# Altium PCB MDBU017A.PcbDoc (part 1 of 2)
Units mil, origin at the board's own origin, x right, y up, seen from the top; angles counter-clockwise.
Board outline 2200 x 2400 mil, 4 copper layers (Top Layer, Signal Layer 1, Signal Layer 2, Bottom Layer), stack 62.8 mil thick; 116 components, 72 nets, 394 pads, 309 vias.
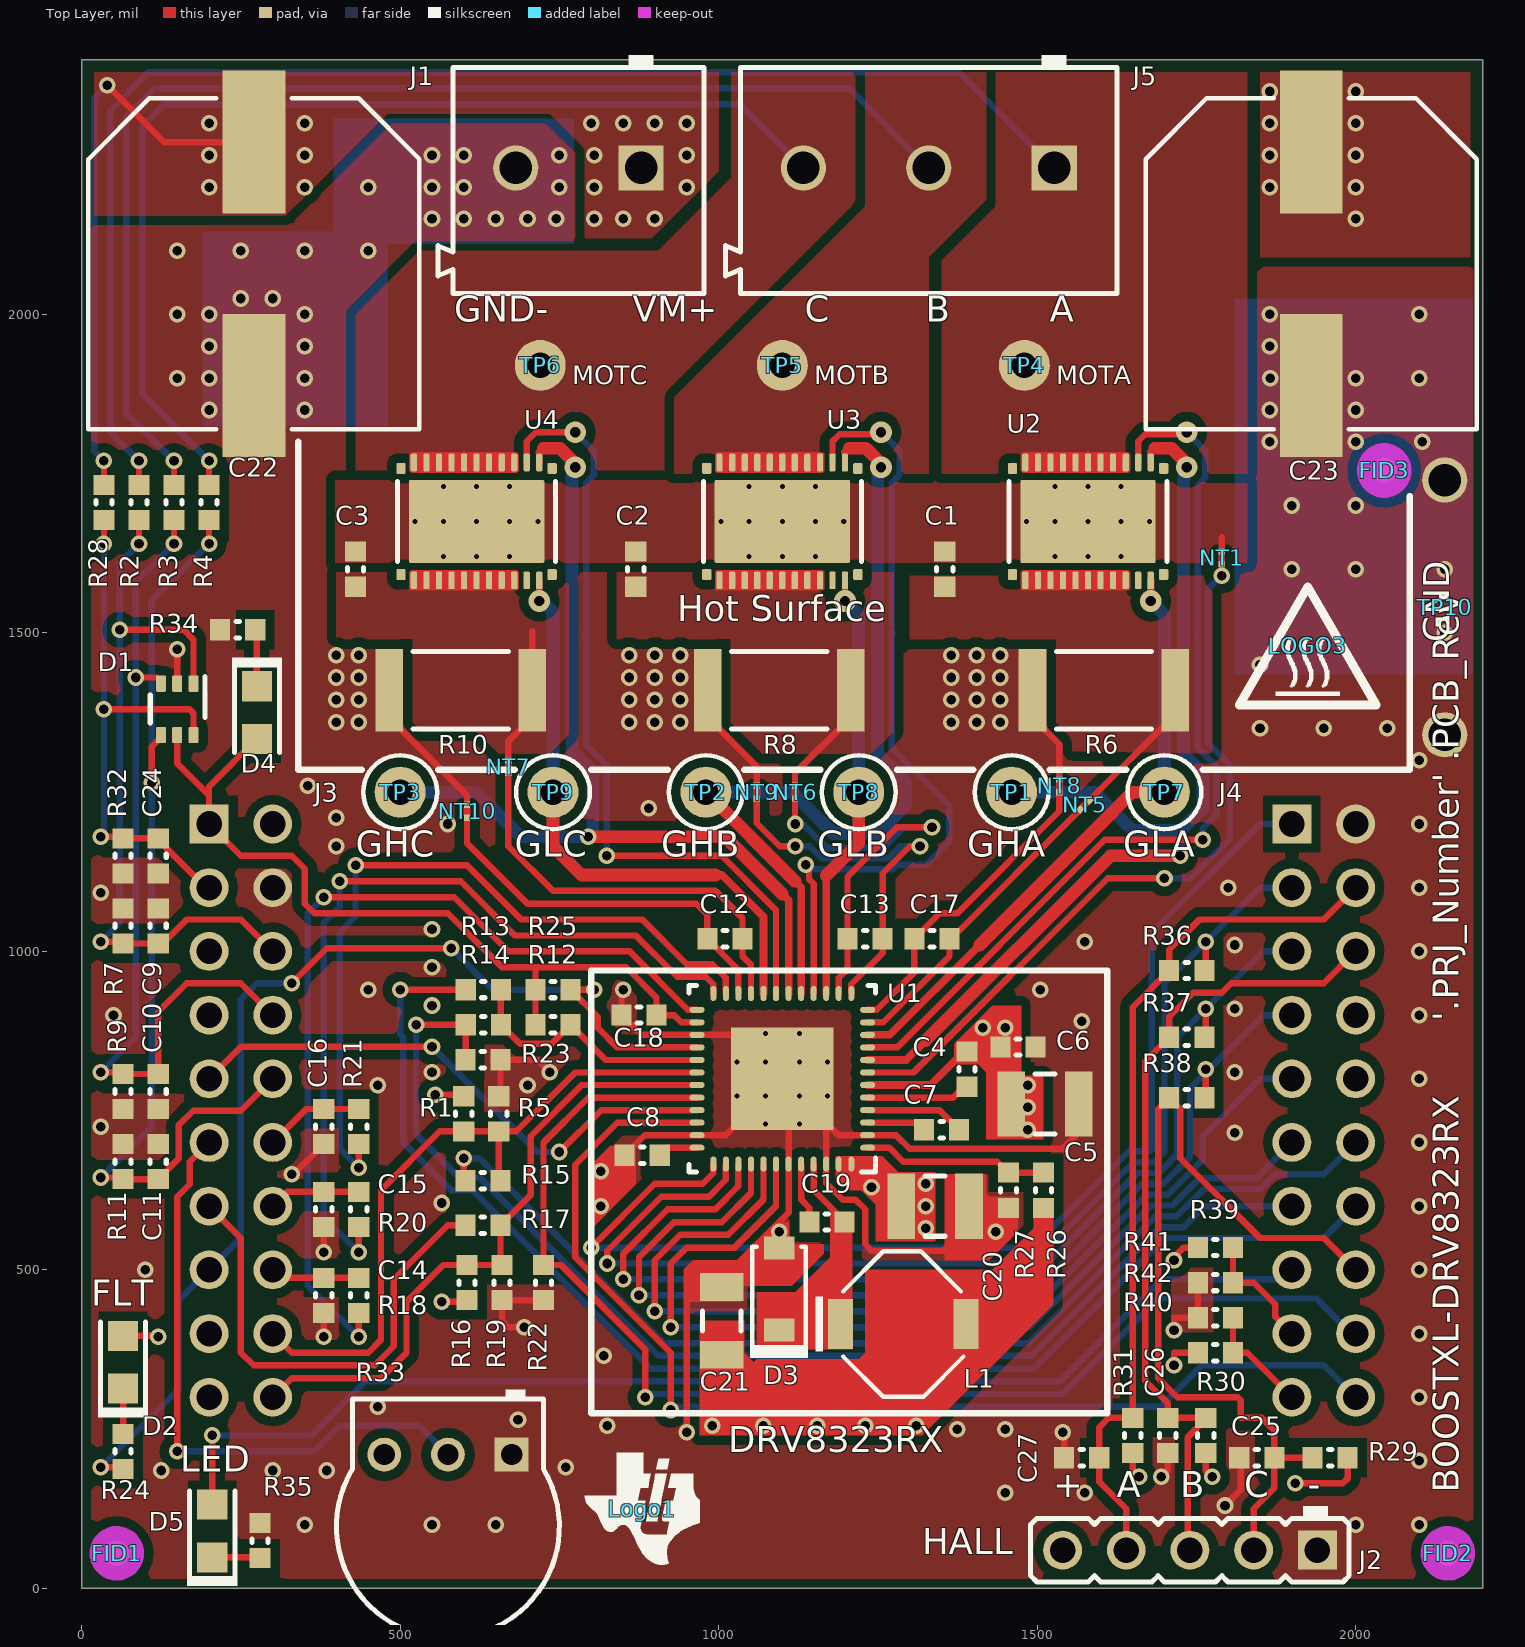
[diagram p0: Top Layer view]
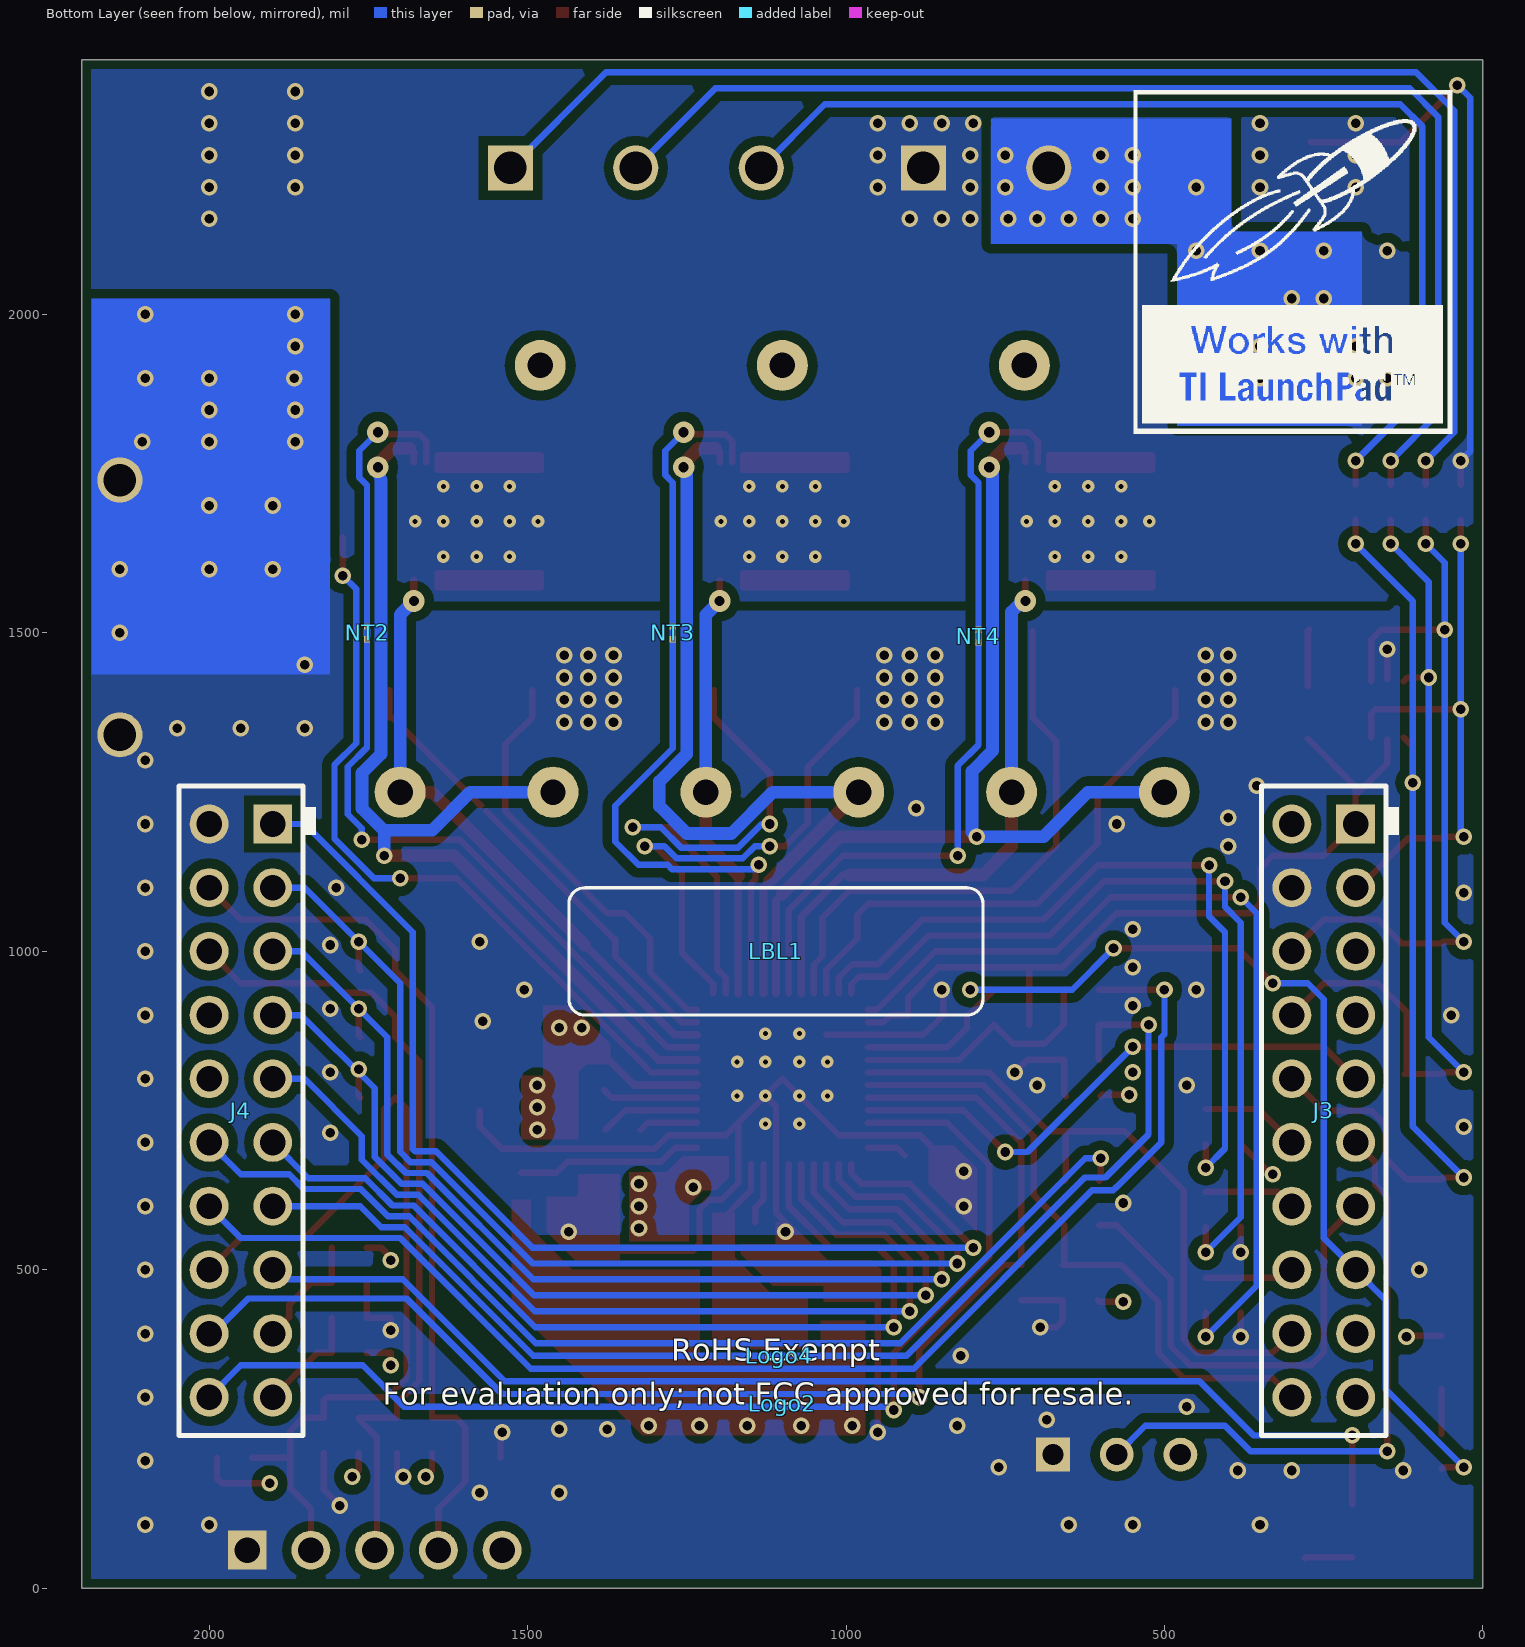
[diagram p1: Bottom Layer view, seen from below]
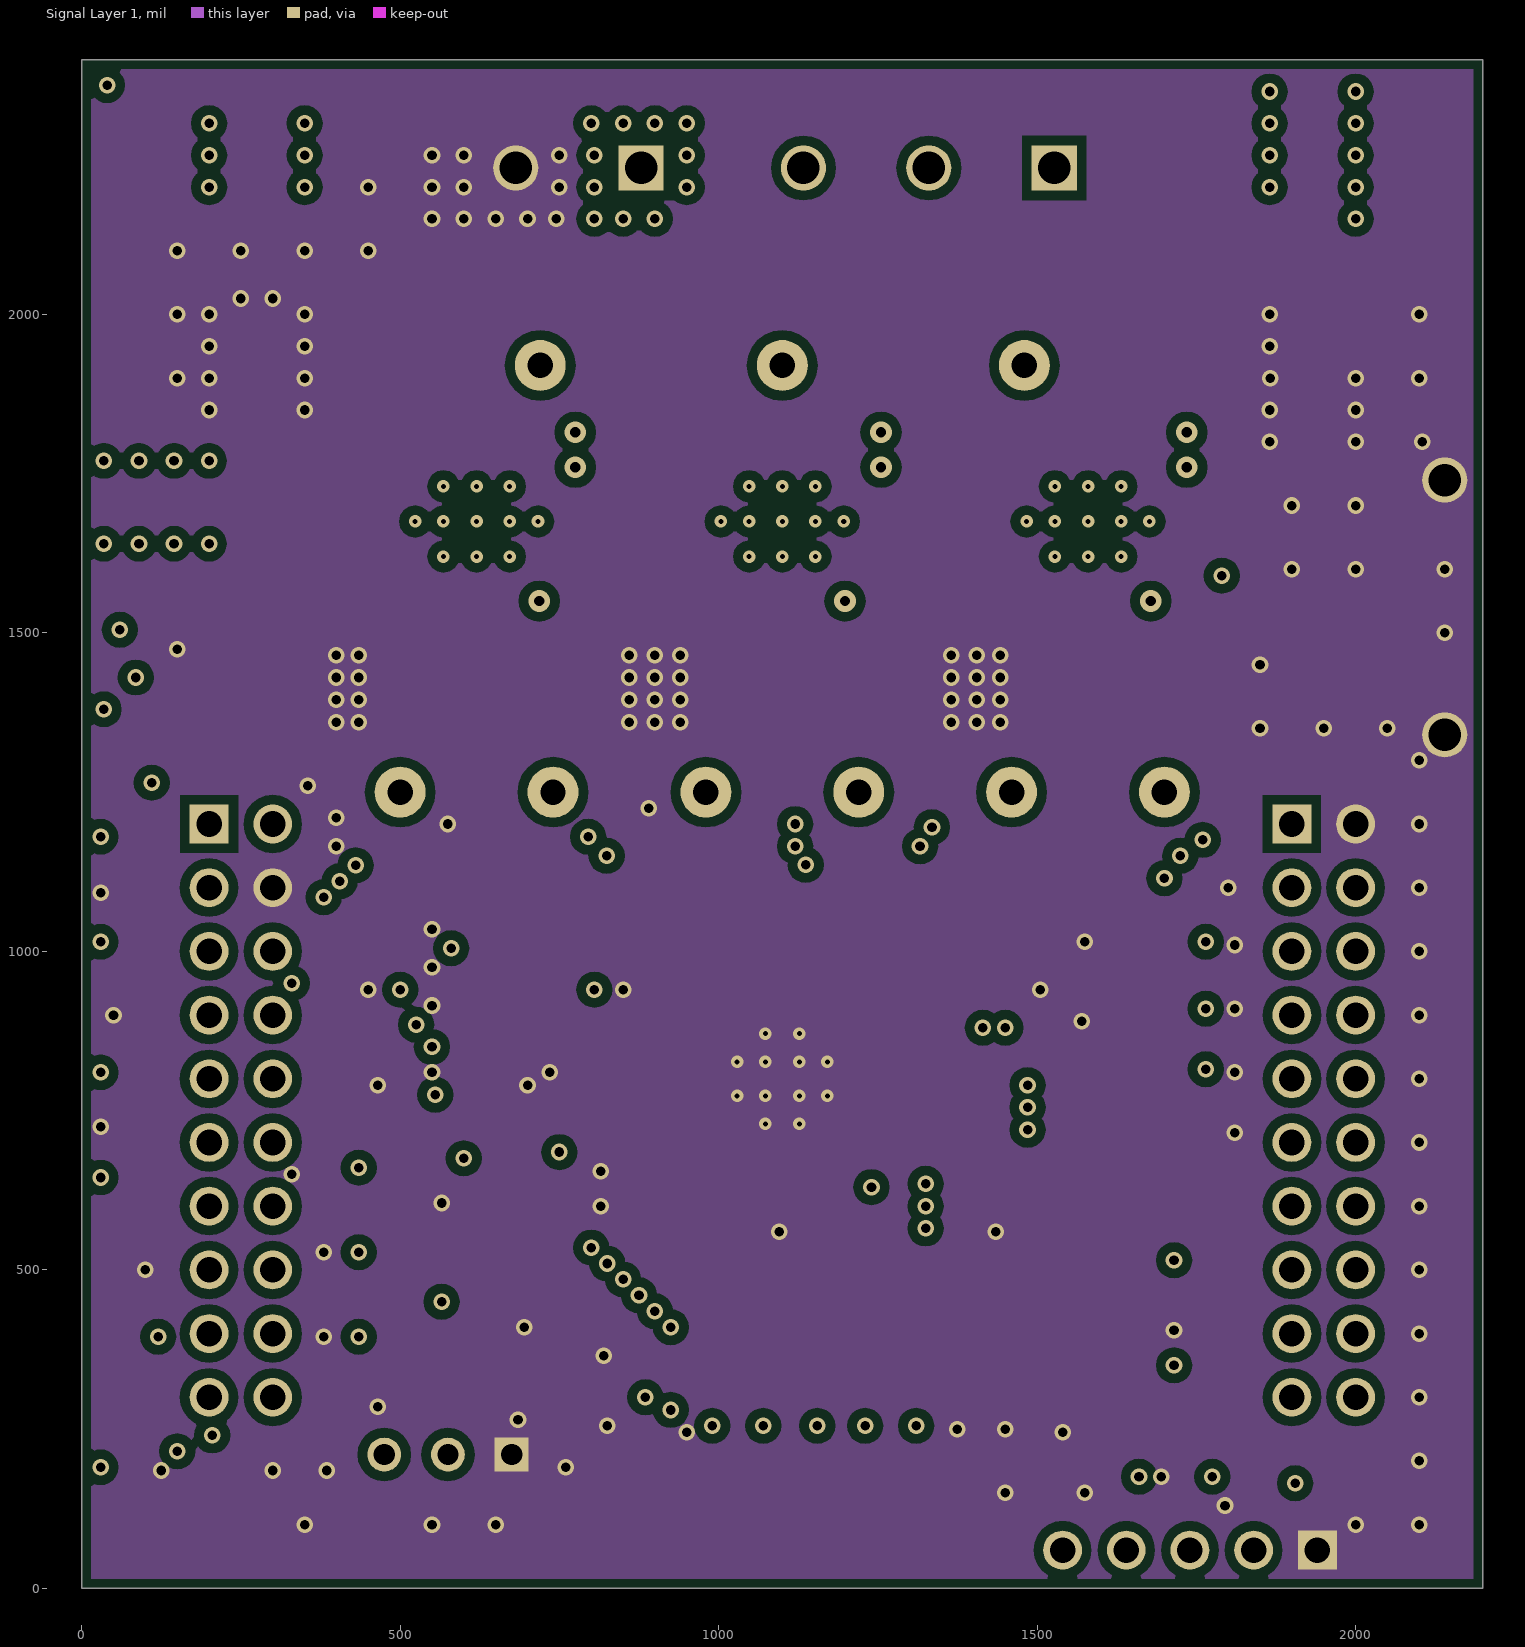
[diagram p2: Signal Layer 1]
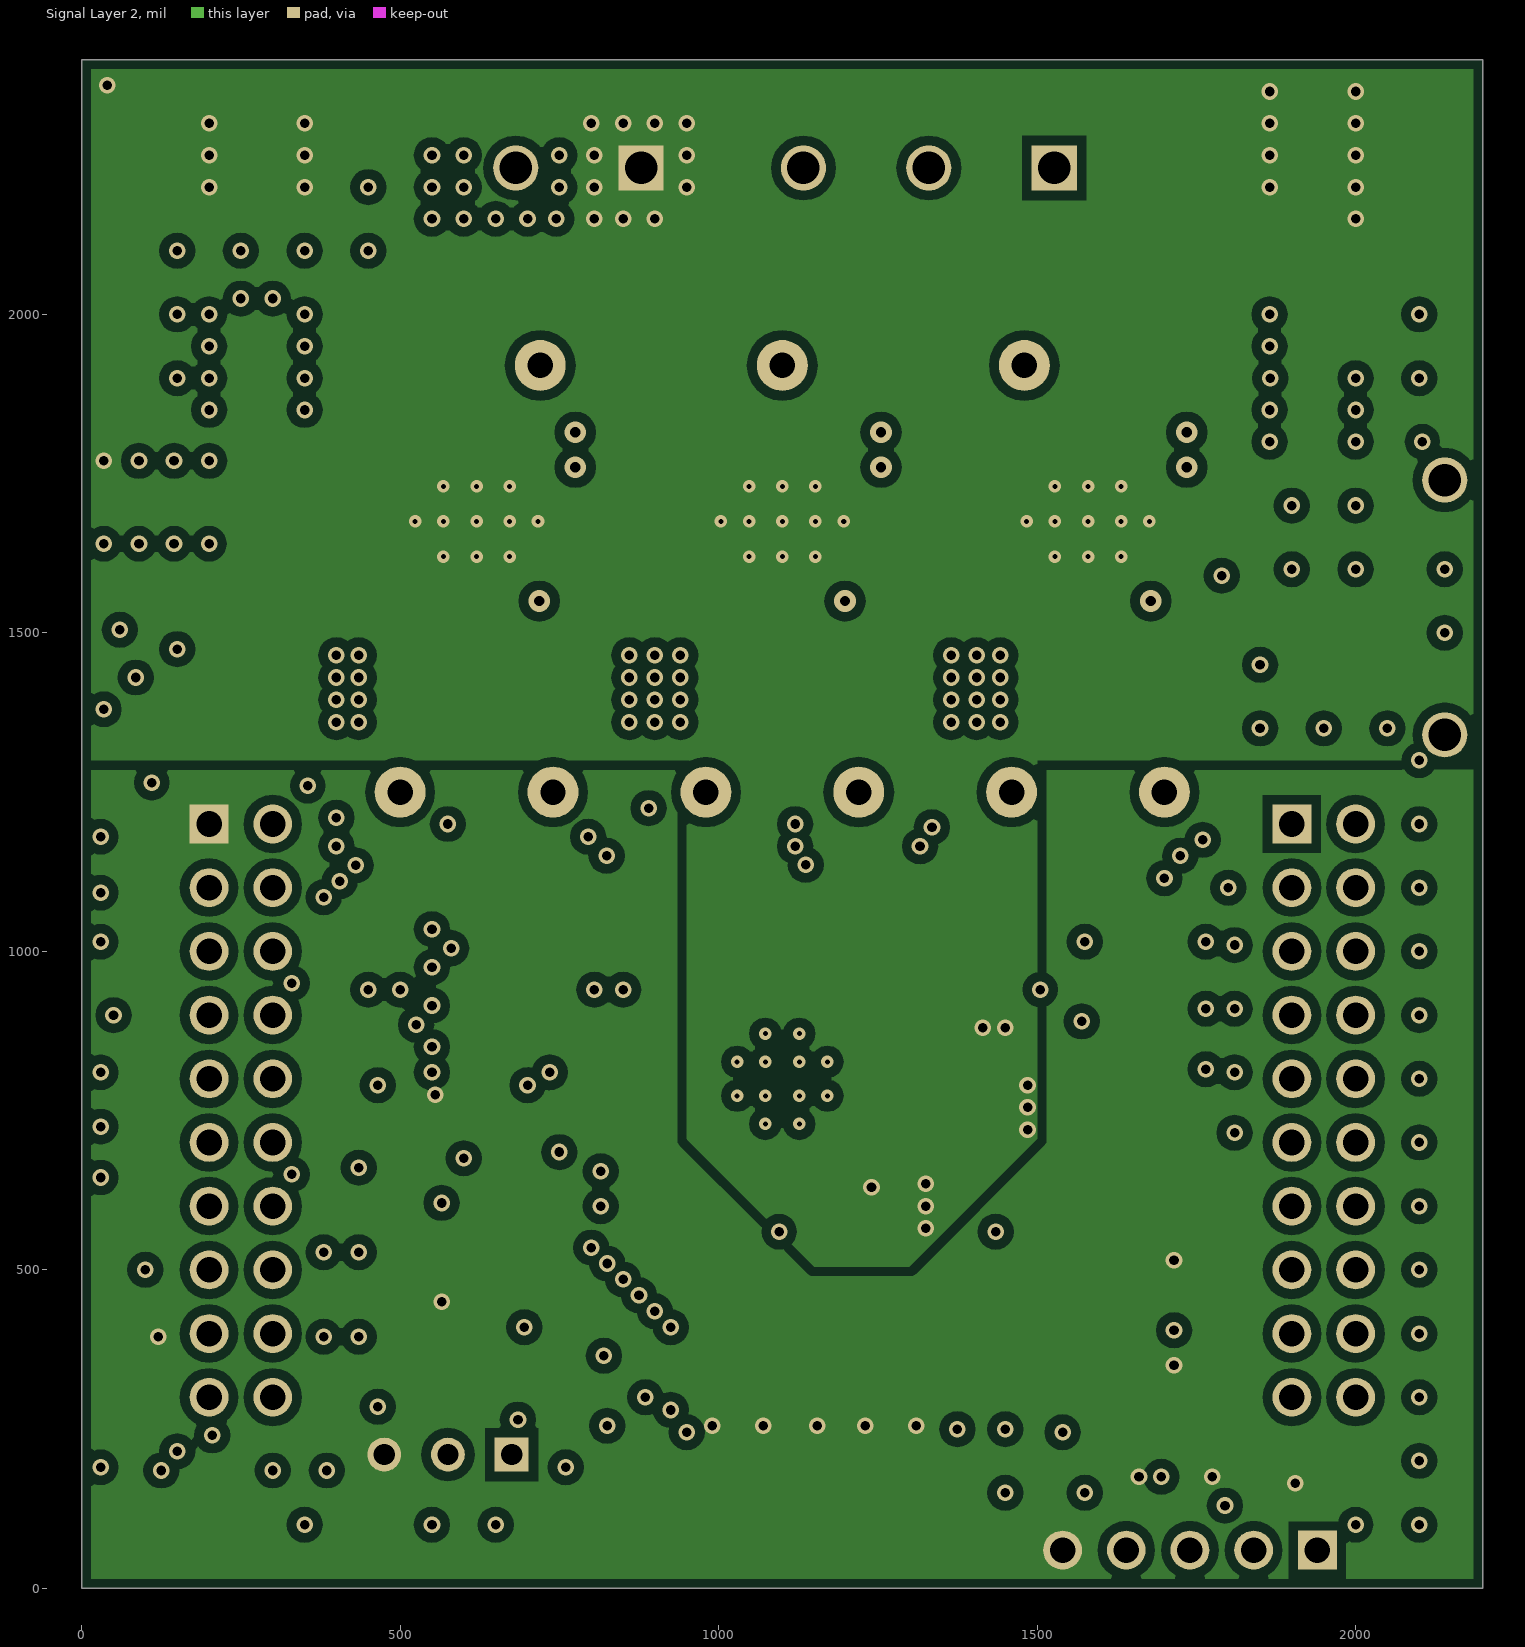
[diagram p3: Signal Layer 2]

## Layer stack, top to bottom
Top Solder: solder mask 0.4, Solder Resist, Dk 3.5
Top Layer: signal copper 2.8
Dielectric 1: prepreg 8, FR-4, Dk 4.2
Signal Layer 1: signal copper 1.4
Dielectric 2: core 38.4, FR-4, Dk 4.2
Signal Layer 2: signal copper 1.4
Dielectric 3: prepreg 8, FR-4, Dk 4.2
Bottom Layer: signal copper 2.8
Bottom Solder: solder mask 0.4, Solder Resist, Dk 3.5

## Board outline
0,0 2200,0 2200,2400 0,2400

## Design rules (kind name [scope] priority, off if disabled: settings)
AcuteAngle [All] p1: minimum=4.50000000000000E+0001 checktracksonly=FALSE
AssemblyTestPointUsage [All] p1: valid=2
BoardOutlineClearance BoardOutlineClearance_MountingHoles [OnCopper and InComponentClass('Mounting Holes')] p1: gap=40
BoardOutlineClearance BoardOutlineClearance_Poly [OnCopper and InPoly] p2: gap=15
BoardOutlineClearance [OnCopper and Not InComponentClass('Logo') and not InComponentClass('FiducialMark') and not InRegion(1000,500,4000,800)] p3: gap=15
Clearance Clearance_Keepouts [((IsTrack Or IsArc) And Not InPoly) And IsFree and IsKeepOut vs ((IsTrack Or IsArc) And Not InPoly) And IsFree and IsKeepOut] p1: gap=0
Clearance Clearance_Poly [InPolygon] p2: gap=15
Clearance [All] p3: gap=7 except(5: SMDPad-Poly SMDPad-Region)
ComponentClearance ComponentClearance_MountingHoles_FiducialMarks [InComponentClass('Mounting Holes') vs InComponentClass('FiducialMark')] p1: gap=50 collisioncheckmode=3 verticalgap=10 showdistances=FALSE
ComponentClearance ComponentClearance_Shunt [InComponentClass('Header') vs InComponentClass('Shunt')] p2: gap=0 collisioncheckmode=3 verticalgap=0 showdistances=FALSE
ComponentClearance ComponentClearance_Logo [InComponentClass('Logo')] p3: gap=20 collisioncheckmode=3 verticalgap=10 showdistances=FALSE
ComponentClearance ComponentClearance_ScrewToNut [(HasFootprint('NY PMS 440 0025 PH')) vs (HasFootprint('Keystone_1902C'))] p4: gap=5 collisioncheckmode=3 verticalgap=10 showdistances=FALSE
ComponentClearance ComponentClearance_MountingHoles [InComponentClass('Mounting Holes')] p5: gap=250 collisioncheckmode=3 verticalgap=100000 showdistances=FALSE
ComponentClearance ComponentClearance_SmallPassives [HasFootprint('0201*') or HasFootprint('0402*') or HasFootprint('0508') or HasFootprint('0603*') or HasFootprint('0612') or HasFootprint('0805*') or HasFootprint('0815*') or HasFootprint('0830*') or HasFootprint('1206*') or HasFootprint('1210*') or HasFootprint('1808*') or HasFootprint('1812*') or HasFootprint('1825*') or HasFootprint('2010*') or HasFootprint('2220*') or HasFootprint('2225*') or HasFootprint('2512*') or HasFootprint('2728*') or HasFootprint('3518*') vs HasFootprint('0201*') or HasFootprint('0402*') or HasFootprint('0508') or HasFootprint('0603*') or HasFootprint('0612') or HasFootprint('0805*') or HasFootprint('0815*') or HasFootprint('0830*') or HasFootprint('1206*') or HasFootprint('1210*') or HasFootprint('1808*') or HasFootprint('1812*') or HasFootprint('1825*') or HasFootprint('2010*') or HasFootprint('2220*') or HasFootprint('2225*') or HasFootprint('2512*') or HasFootprint('2728*') or HasFootprint('3518*')] p6: gap=14.96 collisioncheckmode=3 verticalgap=10 showdistances=FALSE
ComponentClearance ComponentClearance_THtoSMT [IsThruComponent vs IsSMTComponent] p7: gap=20 collisioncheckmode=3 verticalgap=20 showdistances=FALSE
ComponentClearance ComponentClearance_THtoTH [IsThruComponent vs IsThruComponent] p8: gap=20 collisioncheckmode=3 verticalgap=20 showdistances=FALSE
ComponentClearance [All] p9: gap=10 collisioncheckmode=3 verticalgap=10 showdistances=FALSE
DiffPairsRouting [All] p1: maxlimit=100 minlimit=10 mostfreqgap=10 toplayer_minwidth=15 toplayer_maxwidth=15 toplayer_prefwidth=15 midlayer1_minwidth=15 midlayer1_maxwidth=15 midlayer1_prefwidth=15 midlayer2_minwidth=15 midlayer2_maxwidth=15 midlayer2_prefwidth=15 bottomlayer_minwidth=15 bottomlayer_maxwidth=15 bottomlayer_prefwidth=15 maxuncoupledlength=1000
FabricationTestPointUsage TestPointUsage [All] p1: valid=2 allowmultiple=FALSE
FabricationTestpoint Testpoint [All] p1: side=3 testpointundercomponent=TRUE minsize=40 maxsize=100 preferedsize=60 minholesize=0 maxholesize=40 preferedholesize=32 testpointgrid=1 allowsidetop=TRUE allowsidebottom=TRUE usegrid=TRUE gridtolerance=0.01
FanoutControl Fanout_LCC [IsLCC] p1: bgadir=Out bgaviamode=Centered fanoutstyle=Auto fanoutdirection=Alternating viagrid=1 // Fanout_LCC (Default Rule)
FanoutControl Fanout_BGA [IsBGA] p2: bgadir=Out bgaviamode=Centered fanoutstyle=Auto fanoutdirection=Alternating viagrid=1 // Fanout_BGA (Default Rule)
FanoutControl Fanout_Default [All] p4: bgadir=Out bgaviamode=Centered fanoutstyle=Auto fanoutdirection=Alternating viagrid=1 // Fanout_Default (Default Rule)
FanoutControl Fanout_Small [(CompPinCount < 5)] p5: bgadir=Out bgaviamode=Centered fanoutstyle=Auto fanoutdirection=OutThenIn viagrid=1 // Fanout_Small (Default Rule)
HoleSize [All] p1: absolutevalues=TRUE maxlimit=251 minlimit=7.87 maxpercent=80.000 minpercent=20.000
MinimumAnnularRing MinimumAnnularRing_ThermalPadVias [IsVia and InAnyComponent] p1: minimumring=5.91
MinimumAnnularRing [All] p2: minimumring=5.5
MinimumSolderMaskSliver MinimumSolderMaskSliver_Logo [InComponentClass('Logo') vs InComponentClass('Logo')] p1: minsoldermaskwidth=0.7
MinimumSolderMaskSliver [All] p2: minsoldermaskwidth=3.94
PlaneClearance [All] p1: clearance=15
PlaneConnect [All] p1: planeconnectstyle=Relief reliefexpansion=10 reliefentries=4 reliefconductorwidth=10 reliefairgap=10
PolygonConnect [All] p1: connectstyle=Direct reliefconductorwidth=10 reliefentries=4 polygonreliefangle="90 Angle" airgapwidth=10
RoutingVias ThermalPadVias [IsVia and InAnyComponent] p1: holewidth=7.87 width=19.68 viastyle="Through Hole" minholewidth=7.87 minwidth=19.68 maxholewidth=12.99 maxwidth=23.62
RoutingVias [All] p2: holewidth=16 width=34 viastyle="Through Hole" minholewidth=7.87 minwidth=26 maxholewidth=40 maxwidth=65
SilkToBoardRegionClearance [Not ((IsComment or IsDesignator) And (Hide <> 'False')) and not InRegion(1000,500,4000,800)] p1:
SilkToSilkClearance SilkToSilkClearance_Pb-FreeLogo [(HasFootprint('Pb-Free_Overlay_Medium') OR HasFootprint('Pb-Free_Overlay_Small')) vs (HasFootprint('Pb-Free_Overlay_Medium') OR HasFootprint('Pb-Free_Overlay_Small'))] p1: silktosilkclearance=0
SilkToSilkClearance [All] p2: silktosilkclearance=4
SilkToSolderMaskClearance SilkToComponentPadClearance [IsPad and InAnycomponent] p1: minsilkscreentomaskgap=5 clearancetoexposedcopper=TRUE
SilkToSolderMaskClearance "Silk to Solder Mask Opening" [All] p2: minsilkscreentomaskgap=4 clearancetoexposedcopper=FALSE
SolderMaskExpansion [All] p1: expansion=1.97
Width [All] p1: maxlimit=100 minlimit=6 preferedwidth=10 checkconnectedcopper=TRUE
14 further rules are at their usual default settings.

## Classes and differential pairs
component class Header: J2
component class MDBU017A: C1 C2 C3 C4 C5 C6 C7 C8 C9 C10 C11 C12 C13 C14 C15 C16 C17 C18 C19 C20 C21 C22 C23 C24 C25 C26 C27 D1 D2 D3 D4 D5 J1 J2 J3 J4 J5 L1 NT1 NT2 NT3 NT4 NT5 NT6 NT7 NT8 NT9 NT10 R1 R2 R3 R4 R5 R6 R7 R8 R9 R10 R11 R12 R13 R14 R15 R16 R17 R18 R19 R20 R21 R22 R23 R24 R25 R26 R27 R28 R29 R30 R31 R32 R33 R34 R35 R36 R37 R38 R39 R40 R41 R42 Text TP1 TP2 TP3 TP4 TP5 TP6 TP7 TP8 TP9 TP10 U1 U2 U3 U4
component class Label: LBL1
component class AssemblyNote: ZZ1 ZZ2 ZZ3 ZZ4
component class FiducialMark: FID1 FID2 FID3
component class MDBU017A_Hardware: FID1 FID2 FID3 LBL1 Logo1 Logo2 LOGO3 Logo4 ZZ1 ZZ2 ZZ3 ZZ4
component class Logo: Logo1

## Components (designator, comment, footprint, x,y, rotation, side; value= is the part's Value field where it differs from the comment)
C1 "C0603C103K1RACTU" 0603L 1355,1600 r270 top
C2 "C0603C103K1RACTU" 0603L 870,1600 r270 top
C3 "C0603C103K1RACTU" 0603L 430,1600 r270 top
C4 "885012206052" 0603L 1390,815 r270 top
C5 "GRM32ER71K475KE14L" 1210_270L 1512.55,760.25 r0 top
C6 "GRM188R72A104KA35D" 0603L 1470,850 r0 top
C7 "C1608X7S2A473K080AB" 0603L 1350,720 r180 top
C8 "GRM188R70J105KA01D" 0603L 880,680 r180 top
C9 "C0603C104J4RACTU" 0603L 120,1040 r90 top
C10 "C0603C104J4RACTU" 0603L 120,780 r270 top
C11 "C0603C104J4RACTU" 0603L 120,670 r90 top
C12 "GRM188R71C102KA01D" 0603L 1010,1020 r180 top
C13 "GRM188R71C102KA01D" 0603L 1230,1020 r0 top
C14 "GRM188R71C222KA01D" 0603L 380,460 r270 top
C15 "GRM188R71C222KA01D" 0603L 380,595 r270 top
C16 "GRM188R71C222KA01D" 0603L 380,725 r270 top
C17 "GRM188R71C102KA01D" 0603L 1335,1020 r180 top
C18 "GRM188R70J104KA01D" 0603L 875,900 r180 top
C19 "0603YC104JAT2A" 0603L 1170,575 r0 top
C20 "HMK325B7225KN-T" 1210L 1340,600 r0 top
C21 "C3216X7S1A226M160AC" 1206_180L 1005,420 r90 top
C22 "EMVA630ADA331MKG5S" CAPSMT_62_KG5 270,2080 r270 top
C23 "EMVA630ADA331MKG5S" CAPSMT_62_KG5 1930,2080 r270 top
C24 "C0603C104J4RACTU" 0603L 120,1150 r270 top
C25 "885012206034" 0603L 1845,205 r180 top
C26 "885012206034" 0603L 1705,240 r270 top
C27 "885012206034" 0603L 1570,205 r180 top
D1 "TPD4S009DCKR" DCK0006A_L 150,1380 r270 top
D2 "LTST-C170KRKT" LED_LTST-C170 65,355 r270 top
D3 "MBR1H100SFT3G" SOD-123FL 1095,470 r90 top
D4 "LTST-C171GKT" LED_LTST-C171 275,1375 r90 top
D5 "LTST-C171GKT" LED_LTST-C171 205,90 r270 top
FID1 "Fiducial" Fiducial10-20 55,55 r0 top
FID2 "Fiducial" Fiducial10-20 2145,55 r0 top
FID3 "Fiducial" Fiducial10-20 2045,1755 r0 top
J1 "691 101 710 002" Wurth_691101710002 780,2230 r180 top
J2 "PEC05SAAN" Sullins_PxC05SAAN 1740,60 r180 top
J3 "SSQ-110-03-G-D" Samtec_SSQ-110-03-x-D 250,750 r270 bottom
J4 "SSQ-110-03-G-D" Samtec_SSQ-110-03-x-D 1950,750 r270 bottom
J5 "691 101 710 003" Wurth_691101710003 1330,2230 r180 top
L1 "SD53-150-R" SD53 1290,415 r0 top
LBL1 "Size: 0.65\" x 0.20 \"" Label_650x200 1110,1000 r180 bottom
Logo1 "Texas Instruments" TI_Symbol_Overlay_Small 880,125 r0 top
Logo2 "FCC disclaimer" FCC_disclaimer 1100,290 r180 bottom
LOGO3 "CAUTION HOT SURFACE" IEC_HotSurface_Small 1925,1480 r0 top
Logo4 "EU RoHS Exempt Logo" EURoHS_Exempt_60mil 1105,365 r180 bottom
NT1 "Net-Tie" Net-Tie_10mil 1790,1618.24 r90 top net-tie
NT2 "Net-Tie" Net-Tie_10mil 1752,1500 r270 bottom net-tie
NT3 "Net-Tie" Net-Tie_10mil 1272,1500 r270 bottom net-tie
NT4 "Net-Tie" Net-Tie_10mil 792,1495 r270 bottom net-tie
NT5 "Net-Tie" Net-Tie_10mil 1575,1230 r45 top net-tie
NT6 "Net-Tie" Net-Tie_10mil 1120,1250 r90 top net-tie
NT7 "Net-Tie" Net-Tie_10mil 670,1290 r90 top net-tie
NT8 "Net-Tie" Net-Tie_10mil 1535,1260 r90 top net-tie
NT9 "Net-Tie" Net-Tie_10mil 1060,1250 r90 top net-tie
NT10 "Net-Tie" Net-Tie_10mil 605,1220 r90 top net-tie
R1 "CRCW060375K0JNEA" 0603L 600,745 r90 top
R2 "RC0603FR-0782KL" 0603L 90,1705 r90 top
R3 "RC0603FR-0782KL" 0603L 145,1705 r90 top
R4 "RC0603FR-0782KL" 0603L 200,1705 r90 top
R5 "CRCW060375K0JNEA" 0603L 655,745 r270 top
R6 "CRE2512-FZ-R007E-3" 2512L 1605,1410 r0 top
R7 "RC0603FR-074K99L" 0603L 65,1040 r270 top
R8 "CRE2512-FZ-R007E-3" 2512L 1095,1410 r0 top
R9 "RC0603FR-074K99L" 0603L 65,780 r90 top
R10 "CRE2512-FZ-R007E-3" 2512L 595,1410 r0 top
R11 "RC0603FR-074K99L" 0603L 65,670 r270 top
R12 "CRCW06031K50JNEA" 0603L 740,885 r180 top
R13 "CRCW06030000Z0EA" 0603L 630.55,940 r180 top
R14 "CRCW06030000Z0EA" 0603L 630.55,885 r180 top
R15 "CRCW06030000Z0EA" 0603L 630,640 r180 top
R16 "CRCW060375K0JNEA" 0603L 605,480 r270 top
R17 "CRCW06030000Z0EA" 0603L 630,570 r180 top
R18 "CRCW060356R0JNEA" 0603L 435,460 r270 top
R19 "CRCW060375K0JNEA" 0603L 660,480 r90 top
R20 "CRCW060356R0JNEA" 0603L 435,595 r270 top
R21 "CRCW060356R0JNEA" 0603L 435,725 r270 top
R22 "CRCW060347K0JNEA" 0603L 725,480 r90 top
R23 "CRCW060347K0JNEA" 0603L 630,830 r180 top
R24 "CRCW0603330RJNEA" 0603L 65,215 r90 top
R25 "CRCW060310K0JNEA" 0603L 740,940 r180 top
R26 "CRCW060328K0FKEA" 0603L 1510,625 r270 top
R27 "CRCW06038K45FKEA" 0603L 1455,625 r90 top
R28 "RC0603FR-0782KL" 0603L 35,1705 r90 top
R29 "CRCW06031K00JNEA" 0603L 1960,205 r0 top
R30 "CRCW06031K00JNEA" 0603L 1765,240 r270 top
R31 "CRCW06031K00JNEA" 0603L 1650,240 r270 top
R32 "RC0603FR-074K99L" 0603L 65,1150 r90 top
R33 "3352T-1-503LF" Bourns_3352T 575,210 r180 top
R34 "CRCW0603330RJNEA" 0603L 245,1505 r0 top
R35 "CRCW0603330RJNEA" 0603L 280,75 r270 top
R36 "CRCW06030000Z0EA" 0603L 1735,970 r0 top
R37 "CRCW06030000Z0EA" 0603L 1735,865 r0 top
R38 "CRCW06030000Z0EA" 0603L 1735,770 r0 top
R39 "RC0603FR-0735K7L" 0603L 1780,535 r180 top
R40 "RC0603FR-0735K7L" 0603L 1780,370 r180 top
R41 "RC0603FR-0735K7L" 0603L 1780,480 r0 top
R42 "RC0603FR-0735K7L" 0603L 1780,425 r0 top
TP1 "5002" Keystone5002 1460,1250 r0 top
TP2 "5002" Keystone5002 980,1250 r0 top
TP3 "5002" Keystone5002 500,1250 r0 top
TP4 "5002" Keystone5002 1480,1920 r0 top
TP5 "5002" Keystone5002 1100,1920 r0 top
TP6 "5002" Keystone5002 720,1920 r0 top
TP7 "5002" Keystone5002 1700,1250 r0 top
TP8 "5002" Keystone5002 1220,1250 r0 top
TP9 "5002" Keystone5002 740,1250 r0 top
TP10 "D3082-05" Harwin_D3082-05 2140,1540 r90 top
U1 "DRV8323RSRGZR" RGZ0048B 1100,800 r180 top
U2 "CSD88599Q5DC" DMM0022A 1580,1675 r270 top
U3 "CSD88599Q5DC" DMM0022A 1100,1675 r270 top
U4 "CSD88599Q5DC" DMM0022A 620,1675 r270 top
ZZ1 "This Assembly Note is for PCB labels only" AssemblyNoteLabel 55,2740 r0 top
ZZ2 "These assemblies are ESD sensitive, ESD precautions shall be observed." AssemblyNote 55,2649.11 r0 top
ZZ3 "These assemblies must be clean and free from flux and all contaminants. Use of no clean flux is not acceptable." AssemblyNote 55,2560.56 r0 top
ZZ4 "These assemblies must comply with workmanship standards IPC-A-610 Class 2, unless otherwise specified." AssemblyNote 55,2472 r0 top

## Footprints (in the part's own frame and the unit in brackets; to place one, negate y for a bottom-side part, rotate by r counter-clockwise, add the part's x,y. Pads: shape width x height; smd on the part's side, far side on the other; paste and mask are expansions set on the pad)
0603L [mm] "0603 from SM-752 data"
  rect 0.8x0.85 smd: 1(-0.7,0) 2(0.7,0)
  silkscreen extent -0.07,-0.33 0.07,0.33, body extent -0.87,-0.47 0.87,0.47, height 1
1206_180L [mm] "1206_180"
  rect 1.1x1.75 smd: 1(-1.35,0) 2(1.35,0)
  silkscreen extent -0.4,-0.77 0.4,0.77, body extent -1.75,-0.95 1.75,0.95, height 1.8
1210_270L [mm] "1210"
  rect 1.1x2.6 smd: 1(-1.35,0) 2(1.35,0)
  silkscreen extent -0.4,-1.2 0.4,1.2, body extent -1.7,-1.35 1.7,1.35, height 2.7
1210L [mm] "1210 from SM-752 data"
  rect 1.1x2.6 smd: 1(-1.35,0) 2(1.35,0)
  silkscreen extent -0.4,-1.2 0.4,1.2, body extent -1.7,-1.35 1.7,1.35, height 1.35
2512L [mm] "Chip Resistor, Body 6.3x3.2mm, IPC High Density"
  rect 1.1x3.3 smd: 1(-2.85,0) 2(2.85,0)
  silkscreen extent -1.9,-1.55 1.9,1.55, body extent -3.22,-1.67 3.22,1.67, height 0.71
AssemblyNote [mil] "Assembly Note"
AssemblyNoteLabel [mil] "Assembly Note for PCB Labels"
Bourns_3352T [mm] "TH, 3-Leads, Body 9.53x8.89mm, Pitch 2.54mm"
  rect 1.35x1.35 hole 0.85: 1(-2.54,0)
  round 1.35 hole 0.85: 2(0,0) 3(2.54,0)
  silkscreen extent -4.44,-2.6 4.44,7.31, body extent -4.44,-2.21 4.45,7.32, height 3.81
CAPSMT_62_KG5 [mm] "12.5 x 16mm:  Chemi-Con KG5"
  rect 5.7x2.5 smd: 1(-4.838,0.012) 2(4.862,0.012)
  silkscreen extent -6.59,-6.59 6.61,6.61, body extent -6.59,-6.59 6.61,6.61, height 16.5
DCK0006A_L [mm] "SOT23, 6-Leads, Body 2x1.3mm, Pitch 0.65mm, Lead Span 2.1mm, IPC High Density"
  rrect25% 0.65x0.4 smd: 1(-1.025,0.65) 2(-1.025,0) 3(-1.025,-0.65) 4(1.025,-0.65) 5(1.025,0) 6(1.025,0.65)
  silkscreen extent -1.3,-1.07 0.55,1.1, body extent -1.14,-1 1.14,1, height 0.95
DMM0022A [mm] "SON, 27-Leads, Body 5x6mm, Pitch 0.5mm"
  rrect40% 0.7x0.25 smd: 1(-2.35,2.5) 2(-2.35,2) 21(2.35,2) 22(2.35,2.5)
  rrect40% 0.7x0.25 smd mask+0: 3(-2.35,1.5) 4(-2.35,1) 5(-2.35,0.5) 6(-2.35,0) 7(-2.35,-0.5) 8(-2.35,-1) 9(-2.35,-1.5) 10(-2.35,-2) 11(-2.35,-2.5) 12(2.35,-2.5) 13(2.35,-2) 14(2.35,-1.5) 15(2.35,-1) 16(2.35,-0.5) 17(2.35,0) 18(2.35,0.5) 19(2.35,1) 20(2.35,1.5)
  rrect27% 0.43x0.375 smd: 23(-2.115,3.013) 24(-2.115,-3.013) 25(2.115,-3.013) 26(2.115,3.013)
  rrect3% 3.3x5.4 smd paste-1.65: 27(0,0)
  rrect9% 1.41x1.12 on Top Paste: ""(-0.805,1.98) ""(-0.805,0.66) ""(-0.805,-0.66) ""(-0.805,-1.98) ""(0.805,1.98) ""(0.805,0.66) ""(0.805,-0.66) ""(0.805,-1.98)
  Top Layer region: -2.3,-2.5 -2,-2.5 -2,1.5 -2.3,1.5
  Top Layer region: 2.3,1.5 2,1.5 2,-2.5 2.3,-2.5
  Top Layer region: -2.75,-2.575 -2.75,1.575 -2.742,1.613 -2.721,1.646 -2.688,1.667 -2.65,1.675 -2.65,1.675 -2.05,1.675 -2.012,1.667 -1.979,1.646 -1.958,1.613 -1.95,1.575 -1.95,1.575 -1.95,-2.575 -1.958,-2.613 -1.979,-2.646 -2.012,-2.667 -2.05,-2.675 -2.05,-2.675 -2.65,-2.675 -2.688,-2.667 -2.721,-2.646 -2.742,-2.613 -2.75,-2.575
  Top Layer region: 2.75,-2.575 2.75,1.575 2.742,1.613 2.721,1.646 2.688,1.667 2.65,1.675 2.65,1.675 2.05,1.675 2.012,1.667 1.979,1.646 1.958,1.613 1.95,1.575 1.95,1.575 1.95,-2.575 1.958,-2.613 1.979,-2.646 2.012,-2.667 2.05,-2.675 2.05,-2.675 2.65,-2.675 2.688,-2.667 2.721,-2.646 2.742,-2.613 2.75,-2.575
  silkscreen extent -1.6,-3.15 1.6,3.15, body extent -2.5,-3 2.5,3, height 1.05
EURoHS_Exempt_60mil [mil] "EU RoHS Exempt symbol"
FCC_disclaimer [mil]
Fiducial10-20 [mm]
  round 1 smd mask+0.5: 1(0,0)
  Top Layer keep-out circle w1.178: c0,0 r0.5
Harwin_D3082-05 [mm] "Shorting Plug, 10.16mm spacing, TH"
  round 1.8 hole 1.3: 1(-5.08,0) 2(5.08,0)
  body extent -5.6,-0.52 5.61,0.52, height 6.63
IEC_HotSurface_Small [mil]
  silkscreen extent -107,-93 107,92
Keystone5002 [mil] "For Keystone 500x miniature loop terminals"
  round 80 hole 40: 1(0,0)
  silkscreen extent -58,-58 58,58, body extent -49,-49 49,49, height 182
Label_650x200 [mil] "Thermal Transfer Label"
  round 1 on Mech14: 0(0,0)
  silkscreen extent -325,-100 325,100, body extent -325,-100 325,100, height 1
LED_LTST-C170 [mm] "LITE-ON"
  rect 1.2x1.2 smd: 1(-1.05,0) 2(1.05,0)
  silkscreen extent -1.6,-1 2.2,1, body extent -1.05,-0.67 1.05,0.67, height 1.1
LED_LTST-C171 [mm] "LITE-ON"
  rect 1.2x1.2 smd: 1(-1.05,0) 2(1.05,0)
  silkscreen extent -1.6,-1 2.2,1, body extent -1.05,-0.67 1.05,0.67, height 0.8
Net-Tie_10mil [mil] "10mil net tie, no solder mask opening, no solder paste"
  rect 10x10 smd paste-5 mask-5: 1(-10,0) 2(10,0)
  Top Layer region: -6,5 6,5 6,-5 -6,-5
RGZ0048B [mm] "QFN, 48-Leads, Body 7x7mm, Pitch 0.5mm, Thermal Pad 5.15x5.15mm, TI Recommended"
  oval 0.6x0.24 smd: 1(-3.4,2.75) 2(-3.4,2.25) 3(-3.4,1.75) 4(-3.4,1.25) 5(-3.4,0.75) 6(-3.4,0.25) 7(-3.4,-0.25) 8(-3.4,-0.75) 9(-3.4,-1.25) 10(-3.4,-1.75) 11(-3.4,-2.25) 12(-3.4,-2.75) 25(3.4,-2.75) 26(3.4,-2.25) 27(3.4,-1.75) 28(3.4,-1.25) 29(3.4,-0.75) 30(3.4,-0.25) 31(3.4,0.25) 32(3.4,0.75) 33(3.4,1.25) 34(3.4,1.75) 35(3.4,2.25) 36(3.4,2.75)
  oval 0.24x0.6 smd: 13(-2.75,-3.4) 14(-2.25,-3.4) 15(-1.75,-3.4) 16(-1.25,-3.4) 17(-0.75,-3.4) 18(-0.25,-3.4) 19(0.25,-3.4) 20(0.75,-3.4) 21(1.25,-3.4) 22(1.75,-3.4) 23(2.25,-3.4) 24(2.75,-3.4) 37(2.75,3.4) 38(2.25,3.4) 39(1.75,3.4) 40(1.25,3.4) 41(0.75,3.4) 42(0.25,3.4) 43(-0.25,3.4) 44(-0.75,3.4) 45(-1.25,3.4) 46(-1.75,3.4) 47(-2.25,3.4) 48(-2.75,3.4)
  rect 4.1x4.1 smd paste-2.575: 49(0,0)
  silkscreen extent -3.72,-3.72 3.72,3.72, body extent -3.57,-3.58 3.58,3.57, height 1.01
Samtec_SSQ-110-03-x-D [mm] "Receptacle, 2.54mm, 10x2, TH"
  rect 1.55x1.55 hole 1.02: 1(-11.43,1.27)
  round 1.55 hole 1.02: 2(-11.43,-1.27) 3(-8.89,1.27) 4(-8.89,-1.27) 5(-6.35,1.27) 6(-6.35,-1.27) 7(-3.81,1.27) 8(-3.81,-1.27) 9(-1.27,1.27) 10(-1.27,-1.27) 11(1.27,1.27) 12(1.27,-1.27) 13(3.81,1.27) 14(3.81,-1.27) 15(6.35,1.27) 16(6.35,-1.27) 17(8.89,1.27) 18(8.89,-1.27) 19(11.43,1.27) 20(11.43,-1.27)
  silkscreen extent -12.95,-2.48 12.95,3, body extent -12.95,-2.48 12.95,2.48, height 8.51
SD53 [mm] "COOPER BUSSMAN"
  rect 1x2 smd: 1(-2.5,0) 2(2.5,0)
  silkscreen extent -3.5,-2.9 2.4,2.9, body extent -2.86,-2.86 2.86,2.86, height 3.01
SOD-123FL [mm] "Copied from SOD-123"
  rect 0.915x1.22 smd: 1(-1.637,0) 2(1.637,0)
  silkscreen extent -2.74,-1.16 1.68,1.16, body extent -1.9,-0.9 1.9,0.9, height 1
Sullins_PxC05SAAN [mm] "Header, 2.54mm, 5x1, TH"
  rect 1.55x1.55 hole 1.016: 1(-5.08,0)
  round 1.55 hole 1.016: 2(-2.54,0) 3(0,0) 4(2.54,0) 5(5.08,0)
  silkscreen extent -6.35,-1.75 6.35,1.27, body extent -6.35,-1.27 6.35,1.27, height 5.84
TI_Symbol_Overlay_Small [mil]
  silkscreen extent -90,-88 91,88
Wurth_691101710002 [mm] "Terminal Block, 5 mm, 2x1, TH"
  rect 1.8x1.8 hole 1.3: 1(-2.5,0)
  round 1.8 hole 1.3: 2(2.5,0)
  silkscreen extent -5,-4.5 5.6,5, body extent -5.6,-4 5.6,5, height 12.5
Wurth_691101710003 [mm] "Terminal Block, 5 mm, 3x1, TH"
  rect 1.8x1.8 hole 1.3: 1(-5,0)
  round 1.8 hole 1.3: 2(0,0) 3(5,0)
  silkscreen extent -7.5,-4.5 8.1,5, body extent -8.1,-4 8.1,5, height 12.5

## Part data
C1 C2 C3: "CAP, CERM, 0.01 µF, 100 V, +/- 10%, X7R, 0603"
C4: "CAP, CERM, 1 µF, 16 V, +/- 10%, X7R, 0603"
C5: "CAP, CERM, 4.7 µF, 80 V, +/- 10%, X7R, 1210"
C6: "CAP, CERM, 0.1 µF, 100 V, +/- 10%, X7R, 0603"
C7: "CAP, CERM, 0.047 µF, 100 V, +/- 10%, X7S, 0603"
C8: "CAP, CERM, 1 µF, 6.3 V, +/- 10%, X7R, 0603"
C9 C10 C11 C19 C24: "CAP, CERM, 0.1 µF, 16 V, +/- 5%, X7R, 0603"
C12 C13 C17: "CAP, CERM, 1000pF, 16V, +/-10%, X7R, 0603"
C14 C15 C16: "CAP, CERM, 2200pF, 16V, +/-10%, X7R, 0603"
C18: "CAP, CERM, 0.1 µF, 6.3 V, +/- 10%, X7R, 0603"
C20: "CAP, CERM, 2.2 µF, 100 V, +/- 10%, X7R, 1210"
C21: "CAP, CERM, 22 µF, 10 V, +/- 20%, X7S, 1206"
C22 C23: "CAP, AL, 330 µF, 63 V, +/- 20%, SMD"
C25 C26 C27: "CAP, CERM, 1000 pF, 16 V, +/- 10%, X7R, 0603"
D1: "ESD Solution for High-Speed Differential Interface, 4 Channels, -40 to +85 degC, 6-pin SC70 (DCK), Green (RoHS & no Sb/Br)"
D2: "LED, Red, SMD"
D3: "Diode, Schottky, 100 V, 1 A, SOD-123FL"
D4 D5: "LED, Green, SMD"
FID1 FID2 FID3: "Fiducial mark.  There is nothing to buy or mount."
J1: "Terminal Block, 5 mm, 2x1, Tin, TH"
J2: "Header, 2.54mm, 5x1, Tin, TH"
J3 J4: "Receptacle, 2.54mm, 10x2, Gold, TH"
J5: "Terminal Block, 5 mm, 3x1, Tin, TH"
L1: "Inductor, Shielded Drum Core, Ferrite, 15 µH, 1.1 A, 0.122 ohm, SMD"
LBL1: library part THT-14-423-10, "Thermal Transfer Printable Labels, 0.650\" W x 0.200\" H - 10,000 per roll"
Logo1: library part TI_Logo, "Texas Instrument Corporate Signature"
Logo2: library part FCC_disclaimer, "FCC_disclaimer"
LOGO3: library part IEC_HotSurface, "IEC 61010-1 Hot Surface Warning"
Logo4: library part EURoHS_Exempt
NT1 NT2 NT3 NT4 NT5 NT6 NT7 NT8 NT9 NT10: "Single point connection between nets."
R1 R5 R16 R19: "RES, 75 k, 5%, 0.1 W, 0603"
R2 R3 R4 R28: "RES, 82.0 k, 1%, 0.1 W, 0603"
R6 R8 R10: library part PMR100HZPFU7L00, "RES SMD 0.007 OHM 1% 3W 2512"
R7 R9 R11 R32: "RES, 4.99 k, 1%, 0.1 W, 0603"
R12: "RES, 1.5 k, 5%, 0.1 W, 0603"
R13 R14 R15 R17 R36 R37 R38: "RES, 0, 5%, 0.1 W, 0603"
R18 R20 R21: "RES, 56 ohm, 5%, 0.1W, 0603"
R22 R23: "RES, 47 k, 5%, 0.1 W, 0603"
R24 R34: "RES, 330 ohm, 5%, 0.1W, 0603"
R25: "RES, 10 k, 5%, 0.1 W, 0603"
R26: "RES, 28.0 k, 1%, 0.1 W, 0603"
R27: "RES, 8.45 k, 1%, 0.1 W, 0603"
R29 R30 R31: "RES, 1.0 k, 5%, 0.1 W, 0603"
R33: "Trimming Potentiometer, 50K, 0.5W, TH"
R35: "RES, 330, 5%, 0.1 W, 0603"
R39 R40 R41 R42: "RES, 35.7 k, 1%, 0.1 W, 0603"
TP1 TP2 TP3 TP4 TP5 TP6 TP7 TP8 TP9: "Test Point, Miniature, White, TH"
TP10: "1mm Uninsulated Shorting Plug, 10.16mm spacing, TH"
U1: "60-V Three-Phase Smart Gate Driver, RGZ0048B"
U2 U3 U4: "60 V Half-Bridge NexFE Power Block, DMM0022A (LSON-CLIP-27)"
ZZ1: library part AssemblyNoteLabel
ZZ2 ZZ3 ZZ4: library part AssemblyNote

## Via types
v1: diameter 26, hole 15, Top Layer to Bottom Layer, tented both sides, 250 vias
v2: diameter 19.68, hole 7.87, Top Layer to Bottom Layer, 45 vias
v3: diameter 34, hole 16, Top Layer to Bottom Layer, tented both sides, 9 vias
v4: diameter 26/26/26/26 (per signal layer), hole 15, Top Layer to Bottom Layer, tented both sides, 5 vias

## Nets (pads, with @x,y where several pads share a name; then routed paths per layer and width w, separated by ;. In a path a pad name is that pad's centre, name@x,y a point inside that pad or via, vN(x,y) a via of type N, cw(c..) or ccw(c..) an arc to the next point about the centre after c; other vN are vias at no path point)
3.3V: C18.1 C21.1 D1.5 D2.1 D4.1 J2.5 J3.1 L1.2 R1.2 R12.2 R16.2 R25.2 R26.2 R29.2 R30.2 R31.2 R33.3 R39.2 R40.2 U1.26 | length 2437.8
  Top Layer w10: D2.1@65,396.34 v1@118.66,396.34 ; D1.5@150,1332.76 150,1295 200,1245 ; D4.1@275,1333.66 200,1258.66 200,1245 ; v1(555,775) 597.56,775 R1.2@600,772.56 ; v1(565,450) 602.56,450 R16.2@605,452.44 ; R12.2@712.44,885 R25.2@712.44,940 712.44,972.44 ; U1.26@966.14,888.58 941.42,888.58 930,900 C18.1@902.56,900 902.56,927.44 855,975 660,975 575,1060 365,1060 350,1075 350,1130 330,1150 250,1150 J3.1@200,1200 200,1245 ; C21.1@1000,386.85 1051.85,335 1325,335 1388.43,398.43 L1.2@1388.43,415 1388.43,433.43 1510,555 R26.2@1510,597.44 ; R31.2@1650,212.44 1650,185 v1(1660,175) ; v1(1715,350) 1715,370 R40.2@1752.44,370 ; v1(1715,515) 1715,520 1730,535 R39.2@1752.44,535 ; R30.2@1765,212.44 1765,185 v1(1775,175) ; v1(1905,165) 1980,165 1987.44,172.44 1987.56,172.44 R29.2@1987.56,205
  other v1: 990,255 1070,255 1155,255 1230,255 1310,255 120,395
CAL: J4.20 U1.34 | length 1795.4
  Top Layer w10: v1@925,275 v1(925,280) 925,370 775,520 775,665 841.1,731.1 U1.34@966.14,731.1
  Bottom Layer w10: v1(925,280) 930,285 1693.84,285 1758.84,350 1950,350 J4.20@2000,300
ENABLE: J3.9 U1.33 | length 882.4
  Top Layer w10: J3.9@200,800 250,850 v1(550,850) ; v1(750,685) 815.79,750.79 U1.33@966.14,750.79
  Bottom Layer w10: v1(550,850) 715,685 v1(750,685)
GHA: TP1.1 U1.8 U2.1 | length 1645.1
  Top Layer w10: U2.1@1678.43,1767.52 1678.43,1783.43
  Top Layer w12: U1.8@1233.86,829.53 1294.53,829.53 1325,860 ; 1678.43,1783.43 1685,1790
  Top Layer w20: 1325,860 1615,1150 v4(1725,1150) ; 1685,1790 1711.19,1789.97 v3@1741.19,1759.97
  Bottom Layer w10: v3@1735,1755 v3(1735,1760)
  Bottom Layer w20: TP1.1@1460,1250 1590,1250 1650,1190 1725.5,1190 1760,1224.5 1760,1280 1730,1310 1730,1740 v3@1735,1755 ; v4(1725,1150) 1725,1189.5
GHB: TP2.1 U1.17 U3.1 | length 1369.5
  Top Layer w10: U3.1@1198.43,1767.52 1198.43,1783.43
  Top Layer w12: 1120,1110 1129.53,1100.47 U1.17@1129.53,933.86 ; 1198.43,1783.43 1205,1790
  Top Layer w20: TP2.1@980,1250 1120,1110 ; 1205,1790 1231.19,1789.97 v3@1261.19,1759.97
  Bottom Layer w10: 1250,1310 1250,1315
  Bottom Layer w20: TP2.1@980,1250 1115,1250 1180,1185 1250,1185 1293.02,1228.02 1293.02,1266.98 1250,1310 ; 1250,1315 v3@1250,1750
  other v3: 1255,1760
GHC: TP3.1 U1.18 U4.1 | length 1518.8
  Top Layer w10: U4.1@718.43,1767.52 718.43,1783.43 ; v1@792,1182 790,1180 v1(795,1180)
  Top Layer w12: 718.43,1783.43 725,1790 ; 1100,1090 1109.84,1080.16 U1.18@1109.84,933.86
  Top Layer w20: 725,1790 751.19,1789.97 v3@781.19,1759.97 ; v1(795,1180) 1010,1180 1100,1090
  Bottom Layer w10: v1@792,1183 v1(795,1180)
  Bottom Layer w20: TP3.1@500,1250 620,1250 690,1180 v1@790,1180 ; v3@770,1755 770,1352.47 770,1315 802.31,1282.69 802.31,1187.31 v1(795,1180)
  other v3: 775,1760
GLA: TP7.1 U1.10 U2.22 | length 965.4
  Top Layer w12: U1.10@1233.86,868.9 1268.9,868.9 1410,1010 ; v3(1678.43,1550) U2.22@1678.43,1582.48
  Top Layer w20: 1410,1010 1592,1192 1650,1250 TP7.1@1700,1250
  Bottom Layer w20: v3(1678.43,1550) 1700,1528.43 TP7.1@1700,1250
GLB: TP8.1 U1.15 U3.22 | length 689.2
  Top Layer w10: v3(1198.42,1550) U3.22@1198.43,1582.48
  Top Layer w12: U1.15@1168.9,933.86 1168.9,1118.9
  Top Layer w20: 1168.9,1118.9 1220,1170 TP8.1@1220,1250
  Bottom Layer w10: v3@1198.42,1539.57 v3(1198.42,1550)
  Bottom Layer w20: v3(1198.42,1550) 1220,1528.43 TP8.1@1220,1250
GLC: TP9.1 U1.20 U4.22 | length 924.7
  Top Layer w10: v3@718.43,1556.32 U4.22@718.43,1582.48 ; v3@724.75,1550 v3@725,1550
  Top Layer w12: 995,1120 1005,1120 1070.47,1054.53 U1.20@1070.47,933.86
  Top Layer w20: TP9.1@740,1250 740,1165 785,1120 995,1120
  Signal Layer 1 w10: v3@721.63,1553.37 v3@725,1550
  Bottom Layer w10: v3(718.42,1550) v3@723,1550
  Bottom Layer w20: v3@723,1550 740,1533 TP9.1@740,1250
GND: C5.2 C6.2 C8.2 C9.2 C10.2 C11.2 C14.2 C15.2 C16.2 C18.2 C20.2 C21.2 C22.2 C23.2 C24.2 C25.2 C26.2 C27.2 D1.2 D3.2 J1.2 J2.1 J3.4 J4.2 NT8.2 NT9.2 NT10.2 R5.1 R6.1 R7.1 R8.1 R9.1 R10.1 R11.1 R19.1 R22.1 R23.1 R27.1 R32.1 R33.1 R34.1 R35.1 R41.1 R42.1 TP10.1 TP10.2 U1.2 U1.27 U1.35 U1.43 U1.46 U1.49 | length 3548.8
  Top Layer w10: D1.2@150,1427.24 v1(150,1474.65) ; v1(330,650) 332.56,650 C16.2@380,697.44 ; v1(380,395) C14.2@380,432.44 ; v1(380,527.76) C15.2@380,567.44 ; R10.1@482.8,1410 482.8,1367.2 605,1245 NT10.2@605,1230 ; R5.1@655,772.56 657.56,775.12 R23.1@657.56,830 715,830 v1(735,810) ; v1(695,410) 670,410 660,420 R19.1@660,452.44 R22.1@725,452.44 ; v1(850,940) 847.44,937.44 C18.2@847.44,900 878.54,868.9 U1.27@966.14,868.9 U1.49@1031.1,868.9 ; C8.2@852.44,680 883.86,711.42 U1.35@966.14,711.42 1011.42,711.42 v2(1073.29,773.29) U1.49@1100,800 v2(1126.71,773.29) ; v1(950,245) 950,455 988.15,493.15 1000,493.15 1013.15,493.15 1109.84,589.84 U1.43@1109.84,666.14 1109.84,756.42 v2(1126.71,773.29) ; R8.1@982.8,1410 982.8,1367.2 1060,1290 NT9.2@1060,1260 ; R27.1@1455,597.44 1452.44,600 C20.2@1393.15,600 1393.15,570 1353.15,530 1240,530 1230,540 1230,595 1215,610 1195,610 1168.9,636.1 U1.46@1168.9,666.14 U1.49@1168.9,731.1 ; R6.1@1492.8,1410 1492.8,1367.2 1535,1325 NT8.2@1535,1270 ; v1(1540,245) 1542.44,242.56 C27.2@1542.44,205 ; C5.2@1574.96,750 1574.96,724.96 1540,690 1300,690 1278.58,711.42 U1.2@1233.86,711.42 1188.58,711.42 U1.49@1168.9,731.1 ; v1(1695,175) 1705,185 C26.2@1705,212.44 ; v1(1715,405) 1715,425 R42.1@1752.44,425 R41.1@1752.44,480 ; v1(1795,130) 1820,155 C25.2@1820,212.44 ; v2(1126.71,773.29) U1.49@1168.9,731.1
  other v1: 350,100 550,100 650,100 2000,100 2100,100 1450,150 1575,150 125,185 300,185 385,185 760,190 2100,200 1375,250 1450,250 825,255 685,265 465,285 2100,300 820,365 2100,400 100,500 2100,500 1095,560 1435,560 815,600 2100,600 565,605 815,655 2100,700 1810,715 30,725 465,790 700,790 2100,800 550,810 1810,810 1570,890 50,900 2100,900 1810,910 550,915 450,940 1505,940 550,975 2100,1000 1810,1010 1575,1015 550,1035 30,1092.24 1800,1100 2100,1100 400,1165 575,1200 2100,1200 400,1210 890,1225 355,1260 2100,1300 1850,1350 1950,1350 2050,1350 400,1360 435,1360 940,1360 1442.2,1360 400,1395 435,1395 860,1395 900,1395 940,1395 1365,1395 1405,1395 1442.2,1395 400,1430 435,1430 860,1430 900,1430 940,1430 1365,1430 1405,1430 1442.2,1430 1850,1450 400,1465 435,1465 860,1465 900,1465 940,1465 1365,1465 1405,1465 1442.2,1465 2140,1500 1900,1600 2000,1600 2140,1600 1900,1700 2000,1700 1865,1800 2000,1800 2105,1800 200,1850 350,1850 1865,1850 2000,1850 150,1900 200,1900 350,1900 1866.26,1900 2000,1900 2100,1900 200,1950 350,1950 1865,1950 150,2000 200,2000 350,2000 1865,2000 2100,2000 250,2025 300,2025 150,2100 250,2100 350,2100 450,2100 550,2150 600,2150 650,2150 700,2150 745,2150 450,2200 550,2200 600,2200 750,2200 550,2250 600,2250 750,2250
  other v2: 1073.29,729.13 1126.71,729.13 1029.13,773.29 1170.87,773.29 1029.13,826.71 1073.29,826.71 1126.71,826.71 1170.87,826.71 1073.29,870.87 1126.71,870.87
  other v4: 860,1360 900,1360 1365,1360 1405,1360
HALLA: C27.1 J2.4 J4.4 R31.1 R36.1 | length 1360.4
  Top Layer w10: J2.4@1640,60 1640,125 1597.56,167.44 C27.1@1597.56,205 1597.56,252.56 1612.56,267.56 R31.1@1650,267.56 1650,912.56 R36.1@1707.44,970 1707.44,1002.44 1755,1050 1950,1050 J4.4@2000,1100
HALLB: C26.1 J2.3 J4.6 R30.1 R37.1 | length 1275.9
  Top Layer w10: J2.3@1740,60 1736.27,63.73 1736.27,236.89 1765,265.62 R30.1@1765,267.56 C26.1@1705,267.56 1705,290.96 1670,325.96 1670,827.56 R37.1@1707.44,865 1707.44,897.44 1745,935 1790,935 1805,950 1950,950 J4.6@2000,1000
HALLC: C25.1 J2.2 J4.16 R29.1 R38.1 | length 1390.5
  Top Layer w10: J2.2@1840,60 1840,125 1872.44,157.44 1872.44,247.56 1852.44,267.56 1820,267.56 1820,295 1815,300 1720,300 1690,330 1690,752.56 R38.1@1707.44,770 1725,752.44 1725,675 1850,550 1950,550 J4.16@2000,500 ; C25.1@1872.56,205 R29.1@1932.44,205
IDRIVE: J3.18 R1.1 R5.2 R15.1 U1.30 | length 1076.9
  Top Layer w10: J3.18@300,400 330,370 450,370 470,390 470,625 562.44,717.44 R1.1@600,717.44 R5.2@655,717.44 ; R15.1@657.56,640 655,642.56 R5.2@655,717.44 ; U1.30@966.14,809.84 774.84,809.84 682.44,717.44 R5.2@655,717.44
INHA: J4.1 U1.37 | length 1829.6
  Top Layer w10: v1(800,535) 900,635 975,635 991.73,651.73 U1.37@991.73,666.14
  Bottom Layer w10: v1(800,535) 1492.67,535 1643.67,686 1676.75,686 1680,689.25 1680,1030 1850,1200 J4.1@1900,1200
INHB: J4.5 R37.2 U1.39 | length 1717.1
  Top Layer w10: v1(850,485) 850,525 920,595 995,595 1031.1,631.1 U1.39@1031.1,666.14 ; R37.2@1762.56,865 1765,867.44 v1(1765,910)
  Bottom Layer w10: v1(850,485) 1490.75,485 1657.75,652 1690.83,652 1720,681.17 1720,865 v1(1765,910) 1855,1000 J4.5@1900,1000
INHC: J4.9 U1.41 | length 1518.5
  Top Layer w10: v1(900,435) 900,515 940,555 1015,555 1070.47,610.47 U1.41@1070.47,666.14
  Bottom Layer w10: v1(900,435) 1488.83,435 1671.83,618 1704.92,618 1760,673.08 1760,710 1850,800 J4.9@1900,800
INLA: J4.3 R36.2 U1.38 | length 1797.8
  Top Layer w10: v1(825,510) 825,530 910,615 985,615 1011.42,641.42 U1.38@1011.42,666.14 ; R36.2@1762.56,970 1765,972.44 v1(1765,1015)
  Bottom Layer w10: v1(825,510) 1491.71,510 1650.71,669 1683.79,669 1700,685.21 1700,950 v1(1765,1015) 1850,1100 J4.3@1900,1100
INLB: J4.7 R38.2 U1.40 | length 1639.3
  Top Layer w10: v1(875,460) 875,520 930,575 1005,575 1050.79,620.79 U1.40@1050.79,666.14 ; R38.2@1762.56,770 1765,772.44 v1(1765,815)
  Bottom Layer w10: v1(875,460) 1489.79,460 1664.79,635 1697.88,635 1740,677.12 1740,785 1855,900 J4.7@1900,900
INLC: J4.11 U1.42 | length 1463.6
  Top Layer w10: v1(925,410) 925,510 950,535 1025,535 1090.16,600.16 U1.42@1090.16,666.14
  Bottom Layer w10: v1(925,410) 1487.88,410 1678.88,601 1711.96,601 1754.96,644 1844,644 J4.11@1900,700
ISENA: C14.1 J3.16 R18.1 | length 140.2
  Top Layer w10: J3.16@300,500 312.44,487.56 C14.1@380,487.56 R18.1@435,487.56
ISENB: C15.1 J3.14 R20.1 | length 147.8
  Top Layer w10: J3.14@302.44,597.56 J3.14@300,600 322.56,622.56 C15.1@380,622.56 R20.1@435,622.56
ISENC: C16.1 J3.12 R21.1 | length 156.8
  Top Layer w10: J3.12@300,700 352.56,752.56 C16.1@380,752.56 R21.1@435,752.56
LED: D5.1 J4.15 | length 1911.4
  Top Layer w10: D5.1@205,131.34 v1(205,240)
  Bottom Layer w10: v1(205,240) 360,240 445,325 1535.96,325 1695.96,485 1885,485 J4.15@1900,500
MODE: J4.13 R14.2 R23.2 | length 1922
  Top Layer w10: v1(525,885) R14.2@602.99,885 602.99,830.55 R23.2@602.44,830
  Bottom Layer w10: v1(525,885) 525,712.56 592.56,645 625,645 905,365 1490.96,365 1692.96,567 1729.88,567 1762.88,600 J4.13@1900,600
MOTA: J5.1 R2.2 TP4.1 U2.3 U2.4 U2.5 U2.6 U2.7 U2.8 U2.9 U2.10 U2.11 | length 2174.9
  Top Layer w10: R2.2@90,1732.56 v1(90,1770)
  Bottom Layer w10: v1(90,1770) 45,1815 45,2320 105,2380 1376.85,2380 J5.1@1526.85,2230
MOTB: J5.2 R3.2 TP5.1 U3.3 U3.4 U3.5 U3.6 U3.7 U3.8 U3.9 U3.10 U3.11 | length 1938.9
  Top Layer w10: R3.2@145,1732.56 v1(145,1770)
  Bottom Layer w10: v1(145,1770) 70,1845 70,2310 115,2355 1205,2355 J5.2@1330,2230
MOTC: J5.3 R4.2 TP6.1 U4.3 U4.4 U4.5 U4.6 U4.7 U4.8 U4.9 U4.10 U4.11 | length 1700
  Top Layer w10: R4.2@200,1732.56 v1(200,1770)
  Bottom Layer w10: v1(200,1770) 95,1875 95,2295 130,2330 1033.15,2330 J5.3@1133.15,2230